# Altium PCB RedesignVaractorTline144Mhz.PcbDoc
Units mil, origin at the board's own origin, x right, y up, seen from the top; angles counter-clockwise.
Board outline 2295 x 1350 mil, 2 copper layers (Top Layer, Bottom Layer); 27 components, 15 nets, 82 pads, 53 vias.
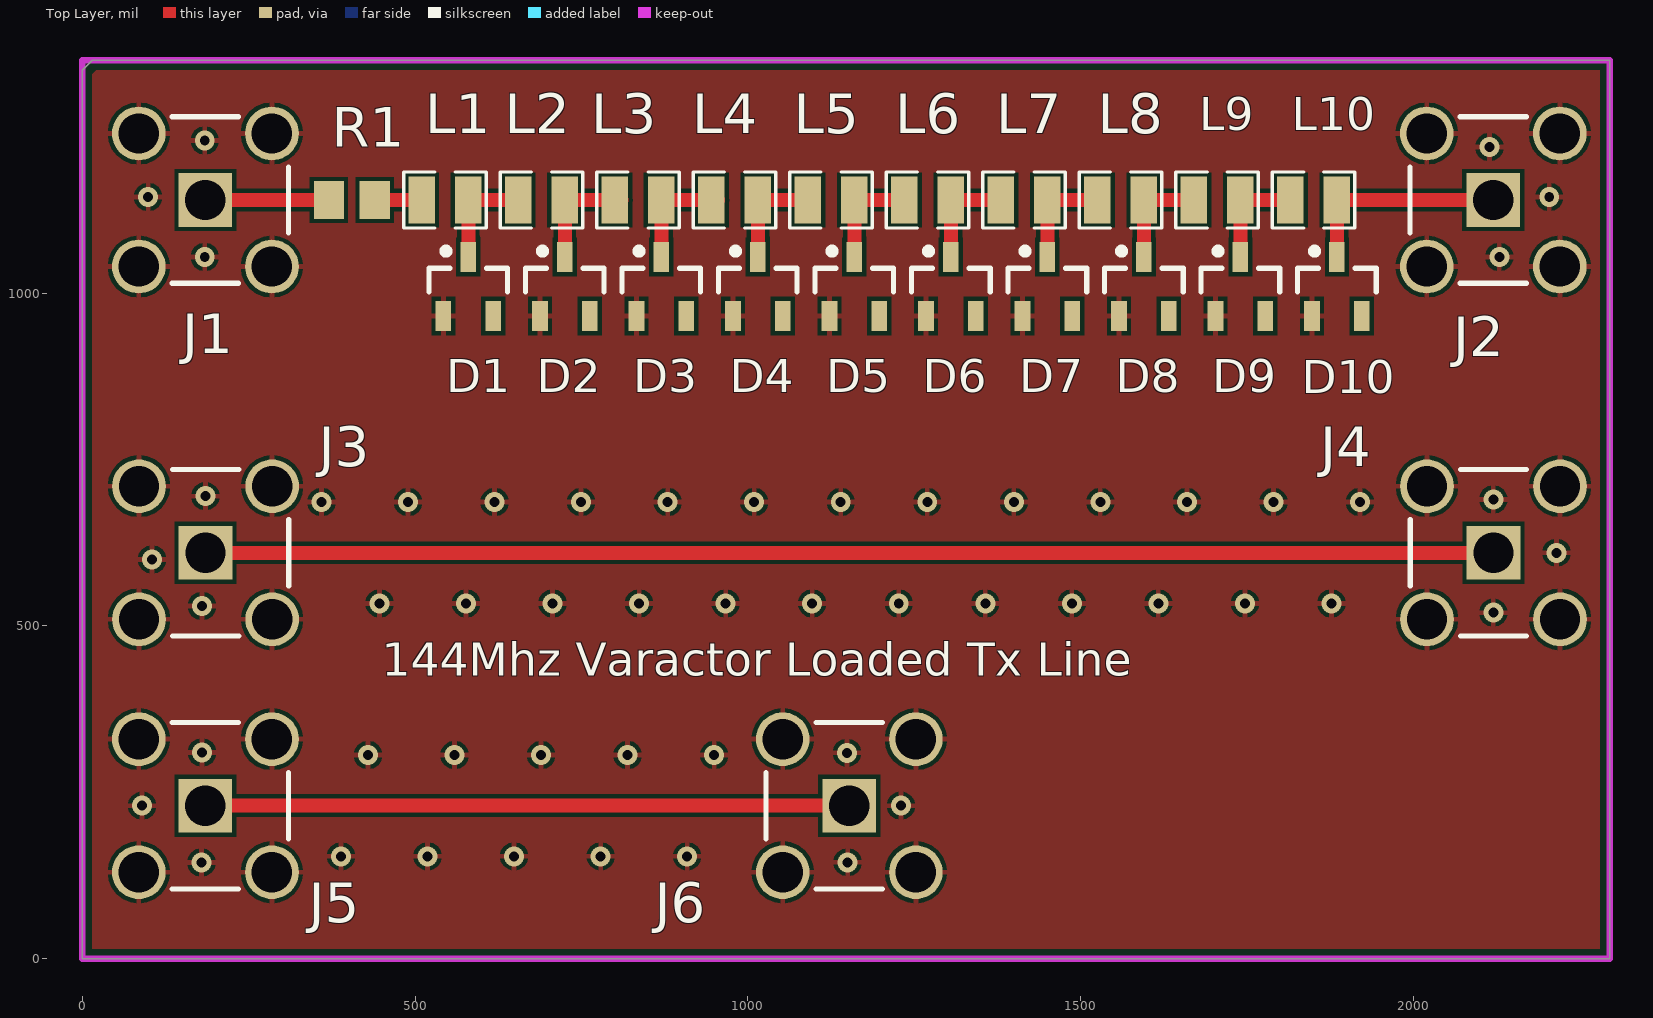
[diagram p0: Top Layer view]
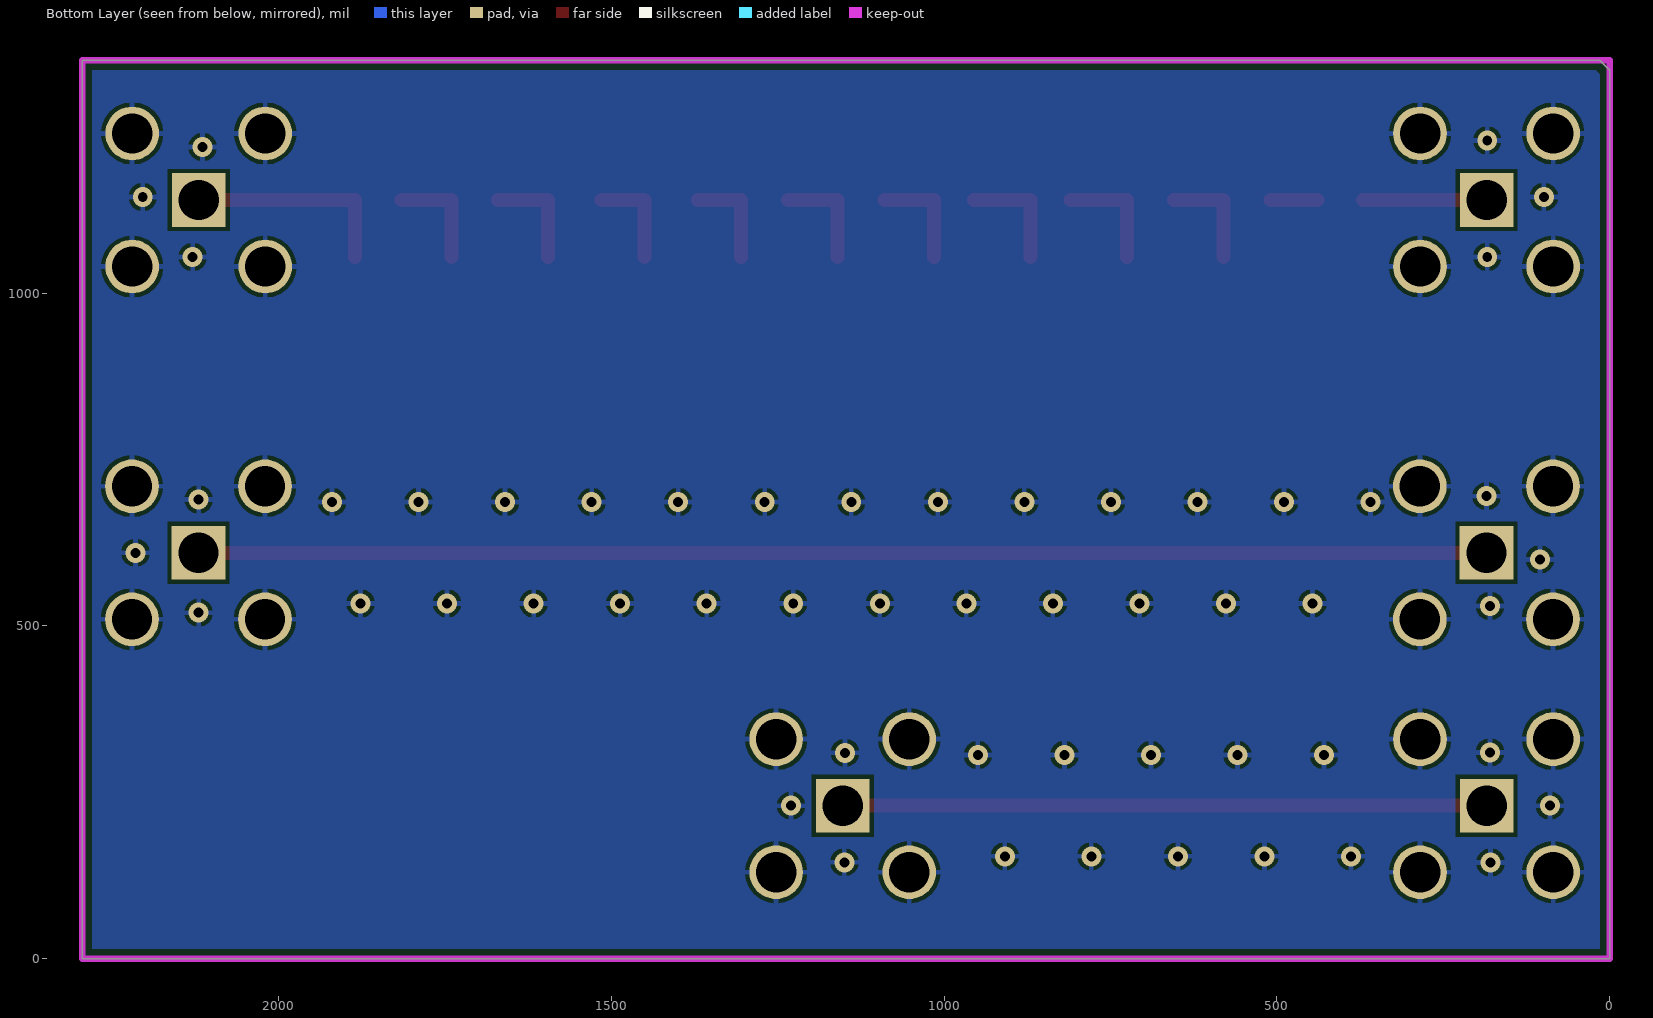
[diagram p1: Bottom Layer view, seen from below]

## Layer stack, top to bottom
Top Solder: solder mask 0.4, Solder Resist, Dk 3.5
Top Layer: signal copper 1.4
Dielectric 1: dielectric 12.598, FR-4, Dk 4.8
Bottom Layer: signal copper 1.4
Bottom Solder: solder mask 0.4, Solder Resist, Dk 3.5

## Board outline
0,1335 0,0 2295,0 2295,1350 15,1350

## Design rules (kind name [scope] priority, off if disabled: settings)
BoardOutlineClearance [All] p1: gap=15 ignorepadtopadclearanceinfootprint=FALSE
Clearance [All] p1: gap=6 ignorepadtopadclearanceinfootprint=FALSE except(0: Arc-Hole Track-Hole SMDPad-Hole THPad-Hole Via-Hole Fill-Hole Poly-Hole Region-Hole Text-Hole)
ComponentClearance [All] p1: gap=1 collisioncheckmode=3 verticalgap=1 showdistances=FALSE
DiffPairsRouting [All] p1: maxlimit=393.7 minlimit=6 mostfreqgap=8 toplayer_minwidth=6 toplayer_maxwidth=15 toplayer_prefwidth=8 bottomlayer_minwidth=6 bottomlayer_maxwidth=15 bottomlayer_prefwidth=8 maxuncoupledlength=500
HoleSize [All] p1: absolutevalues=TRUE maxlimit=265 minlimit=13 maxpercent=80.000 minpercent=20.000
HoleToHoleClearance [All] p1: gap=10 allowstackedmicrovias=FALSE
MinimumAnnularRing [All] p1: minimumring=7
MinimumSolderMaskSliver [All] p1: minsoldermaskwidth=0
PlaneClearance [All] p1: clearance=10
PlaneConnect [All] p1: planeconnectstyle=Direct reliefexpansion=16 reliefentries=4 reliefconductorwidth=6 reliefairgap=6
PolygonConnect [All] p1: connectstyle=Relief reliefconductorwidth=8 reliefentries=4 polygonreliefangle="90 Angle" airgapwidth=6
RoomDefinition RedisignVaractorTline144Mhz [InComponentClass('RedisignVaractorTline144Mhz')] p1: confinementstyle=ConfineOut formatcopy=TRUE lockcomponents=FALSE outline 420,-1900 2420,-1900 2420,-900 420,-900
RoutingCorners [All] p1: cornerstyle=45-Degree minsetback=49.21 maxsetback=49.21
RoutingVias [All] p1: holewidth=15 width=30 viastyle="Through Hole" minholewidth=13 minwidth=27 maxholewidth=100 maxwidth=114
SilkToSilkClearance [All] p1: silktosilkclearance=0
SilkToSolderMaskClearance [IsPad] p1: minsilkscreentomaskgap=4 clearancetoexposedcopper=TRUE
SolderMaskExpansion [All] p1: expansion=2.95 istentingtop=FALSE
Width [All] p1: maxlimit=21.05 minlimit=21.05 preferedwidth=21.05 substack1={EE74C865-3E20-4B42-BFFA-D2353FBDCABD} toplayer_{ee74c865-3e20-4b42-bffa-d2353fbdcabd}_minwidth=10 toplayer_{ee74c865-3e20-4b42-bffa-d2353fbdcabd}_maxwidth=10 toplayer_{ee74c865-3e20-4b42-bffa-d2353fbdcabd}_prefwidth=10 bottomlayer_{ee74c865-3e20-4b42-bffa-d2353fbdcabd}_minwidth=10 bottomlayer_{ee74c865-3e20-4b42-bffa-d2353fbdcabd}_maxwidth=10 bottomlayer_{ee74c865-3e20-4b42-bffa-d2353fbdcabd}_prefwidth=10 impedanceprofiledriven=TRUE minimp=50.000000 maximp=50.000000 favimp=50.000000
20 further rules are at their usual default settings.

## Components (designator, comment, footprint, x,y, rotation, side; value= is the part's Value field where it differs from the comment)
D1 "Diode BBY40" SOT23_N 580,1010 r90 top
D2 "Diode BBY40" SOT23_N 725,1010 r90 top
D3 "Diode BBY40" SOT23_N 870,1010 r90 top
D4 "Diode BBY40" SOT23_N 1015,1010 r90 top
D5 "Diode BBY40" SOT23_N 1160,1010 r90 top
D6 "Diode BBY40" SOT23_N 1305,1010 r90 top
D7 "Diode BBY40" SOT23_N 1450,1010 r90 top
D8 "Diode BBY40" SOT23_N 1595,1010 r90 top
D9 "Diode BBY40" SOT23_N 1740,1010 r90 top
D10 "Diode BBY40" SOT23_N 1885,1010 r90 top
J1 "731000114" MOLX-731000114_V 185,1140 r0 top
J2 "731000114" MOLX-731000114_V 2120,1140 r180 top
J3 "731000114" MOLX-731000114_V 185.32,610 r0 top
J4 "731000114" MOLX-731000114_V 2120.32,610 r180 top
J5 "731000114" MOLX-731000114_V 185,230 r0 top
J6 "731000114" MOLX-731000114_V 1152.5,230 r180 top
L1 "0805HP-56NXJRC" "0805HQ SERIES" 545,1140 r0 top
L2 "0805HP-56NXJRC" "0805HQ SERIES" 690,1140 r0 top
L3 "0805HP-56NXJRC" "0805HQ SERIES" 835,1140 r0 top
L4 "0805HP-56NXJRC" "0805HQ SERIES" 980,1140 r0 top
L5 "0805HP-56NXJRC" "0805HQ SERIES" 1125,1140 r0 top
L6 "0805HP-56NXJRC" "0805HQ SERIES" 1270,1140 r0 top
L7 "0805HP-56NXJRC" "0805HQ SERIES" 1415,1140 r0 top
L8 "0805HP-56NXJRC" "0805HQ SERIES" 1560,1140 r0 top
L9 "0805HP-56NXJRC" "0805HQ SERIES" 1705,1140 r0 top
L10 "0805HP-56NXJRC" "0805HQ SERIES" 1850,1140 r0 top
R1 "Jumper" RESC2013X70X40NL20T20 405,1140 r0 top

## Footprints (in the part's own frame and the unit in brackets; to place one, negate y for a bottom-side part, rotate by r counter-clockwise, add the part's x,y. Pads: shape width x height; smd on the part's side, far side on the other; paste and mask are expansions set on the pad)
"0805HQ SERIES" [mil] "Coilcraft Chip Inductor"
  rect 40x70 smd: 1(-35,0) 2(35,0)
  silkscreen extent -62,-42 62,42, body extent -64,-45 64,45, height 60
MOLX-731000114_V [mm] "Connector, 5-Leads, Body 14.8x6.35mm, Pitch 2.54mm"
  rect 2.05x2.05 hole 1.54: 1(0,0)
  round 2.05 hole 1.54: 2(-2.54,2.54) 3(-2.54,-2.54) 4(2.54,-2.54) 5(2.54,2.54)
  silkscreen extent -1.26,-3.17 3.17,3.17, body extent -11.75,-3.69 3.69,3.69, height 9.57
RESC2013X70X40NL20T20 [mm] "Chip Resistor, 2-Leads, Body 2.00x1.25mm, IPC Medium Density"
  rect 1.15x1.45 smd: 1(-0.875,0) 2(0.875,0)
  body extent -1.1,-0.72 1.1,0.72, height 0.7
SOT23_N [mm] "SOT23, 3-Leads, Body 2.9x1.3mm, Pitch 0.95mm, Lead Span 2.3mm - Reverse Pinning, IPC Medium Density"
  rect 1.15x0.6 smd: 1(1.125,0) 2(-1.125,-0.95) 3(-1.125,0.95)
  silkscreen extent -0.2,-1.5 1.47,1.5, body extent -2,-1.8 2,1.8, height 1.1

## Part data
D1 D2 D3 D4 D5 D6 D7 D8 D9 D10: "SOT23 Silicon Planar Variable Capacitance Diode", ComponentLink1Description="Manufacturer Link", ComponentLink1URL=http://www.zetex.com/, ComponentLink2Description=Datasheet, ComponentLink2URL=www.zetex.com/3.0/pdf/BBY40.pdf, DatasheetVersion=Jan-1998, LatestRevisionDate=29-May-2009, LatestRevisionNote="IPC-7351 Footprint Added.", Note="Pin 2 is not connected and not drawn.", PackageDescription="3-Pin SOT-23 Package 0.95 mm Pitch, 2.3 mm Lead Span - Reverse Pinning", PackageReference=SOT23, PackageVersion=1996, Published=8-Jun-2000, Publisher="Altium Limited"
J1 J2 J3 J4 J5 J6: library part CMP-2000-05487-1, "SMA Right-Angle PCB Jack Receptacle, Brass Body, Gold Plated, 50 Ohm, 5-Pin THD, RoHS, Tray", Manufacturer=Molex, Package Description="5-Pin Through Hole Device, Body 14.8 x 6.35 mm, Pitch 2.54 mm", Datasheet URL=http://www.molex.com/webdocs/datasheets/pdf/en-us/0731000114_RF_COAX_CONNECTORS.pdf, Datasheet Version=09/2016, Manufacturer URL=http://www.molex.com/, Mounting Technology=ThroughHole, Package Reference=731000114, Package URL=http://www.molex.com/pdm_docs/sd/731000114_sd.pdf
L1 L2 L3 L4 L5 L6 L7 L8 L9 L10: "0805HP-56NXJRC Coilcraft Variable Inductor", Manufacturer=Coilcraft, ComponentLink1Description=Datasheet, ComponentLink1URL=https://www.coilcraft.com/0805hp.cfm, Unit Price=$0.82
R1: library part CMP-1665-00002-5, "Chip Resistor, 0 Ohm, +/- 1%, 0.125 W, -55 to 155 degC, 0805 (2012 Metric), RoHS, Tape and Reel", Case Code (Imperial)=0805, Case Code (Metric)=2012, Max Operating Temperature="155 degC", Min Operating Temperature="-55 degC", Package Quantity=5000, PartNumber=ERJ-6GEY0R00V, Resistance="0 Ohm", Tolerance=5%, Case/Package=0805, ComponentLink1Description="Manufacturer URL", ComponentLink1URL=http://www.panasonic.com/, ComponentLink2Description=Datasheet, ComponentLink2URL=http://industrial.panasonic.com/cdbs/www-data/pdf/RDA0000/AOA0000C84.pdf, DatasheetVersion=03/2015, Height="0.6 mm", Length="2 mm", Mounting Technology="Surface Mount", PackageDescription="2-Pin Surface Mount Device, Body 2 x 1.25 mm", Packaging="Tape and Reel", Radiation Hardening=No, REACH SVHC="No SVHC", RoHSCompliant=True, Width="1.25 mm"

## Via types
v1: diameter 30, hole 15, Top Layer to Bottom Layer, 53 vias

## Nets (pads, with @x,y where several pads share a name; then routed paths per layer and width w, separated by ;. In a path a pad name is that pad's centre, name@x,y a point inside that pad or via, vN(x,y) a via of type N, cw(c..) or ccw(c..) an arc to the next point about the centre after c; other vN are vias at no path point)
GND: D1.3 D2.3 D3.3 D4.3 D5.3 D6.3 D7.3 D8.3 D9.3 D10.3 J1.2 J1.3 J1.4 J1.5 J2.2 J2.3 J2.4 J2.5 J3.2 J3.3 J3.4 J3.5 J4.2 J4.3 J4.4 J4.5 J5.2 J5.3 J5.4 J5.5 J6.2 J6.3 J6.4 J6.5
  other v1: 179.07,144.44 1150,145 388.93,153.96 518.93,153.96 648.93,153.96 778.93,153.96 908.93,153.96 90,230 1230,230 429.46,306.04 559.46,306.04 689.46,306.04 819.46,306.04 949.46,306.04 1149.07,309.44 180,310 2120,520 180,530 446.75,533.96 576.75,533.96 706.75,533.96 836.75,533.96 966.75,533.96 1096.75,533.96 1226.75,533.96 1356.75,533.96 1486.75,533.96 1616.75,533.96 1746.75,533.96 1876.75,533.96 105,600 2215,610 359.59,686.04 489.59,686.04 619.59,686.04 749.59,686.04 879.59,686.04 1009.59,686.04 1139.59,686.04 1269.59,686.04 1399.59,686.04 1529.59,686.04 1659.59,686.04 1789.59,686.04 1919.59,686.04 2120,690 185,695 184.07,1054.44 2129.07,1054.44 99.07,1144.44 2204.07,1144.44 2114.07,1219.44 184.07,1229.44
NetD1_1: D1.1 L1.2 L2.1 | length 160.7
  Top Layer w21.05: D1.1 580,1087.45 L1.2 L2.1
NetD2_1: D2.1 L2.2 L3.1 | length 170.7
  Top Layer w21.05: D2.1 L2.2 L3.1 L3.1@810,1140
NetD3_1: D3.1 L3.2 L4.1 | length 170.7
  Top Layer w21.05: D3.1 L3.2 L4.1 L4.1@955,1140
NetD4_1: D4.1 L4.2 L5.1 | length 160.7
  Top Layer w21.05: D4.1 1015,1087.45 L4.2 L5.1
NetD5_1: D5.1 L5.2 L6.1 | length 160.7
  Top Layer w21.05: D5.1 1160,1087.45 L5.2 L6.1
NetD6_1: D6.1 L6.2 L7.1 | length 151
  Top Layer w21.05: D6.1 1305,1094.48 L6.2 1369.29,1140 1369.65,1139.65 L7.1@1370,1140
NetD7_1: D7.1 L7.2 L8.1 | length 151
  Top Layer w21.05: D7.1 1450,1094.48 L7.2 1514.29,1140 1514.65,1139.65 L8.1@1515,1140
NetD8_1: D8.1 L8.2 L9.1 | length 160.7
  Top Layer w21.05: D8.1 1595,1094.48 L8.2 L9.1
NetD9_1: D9.1 L9.2 L10.1 | length 160.7
  Top Layer w21.05: D9.1 1740,1094.48 L9.2 L10.1
NetD10_1: D10.1 J2.1 L10.2 | length 310.7
  Top Layer w21.05: D10.1 1885,1094.48 L10.2 J2.1@2110,1140
NetJ1_1: J1.1 R1.1 | length 185.6
  Top Layer w21.05: J1.1 R1.1
NetJ3_1: J3.1 J4.1 | length 1935
  Top Layer w21.05: J3.1 J4.1
NetJ5_1: J5.1 J6.1 | length 974.6
  Top Layer w21.05: J5.1@190,225 J5.1 J6.1
NetL1_1: L1.1 R1.2 | length 70.6
  Top Layer w21.05: R1.2 L1.1
pads on no net: D1.2 D2.2 D3.2 D4.2 D5.2 D6.2 D7.2 D8.2 D9.2 D10.2

## Polygon pours and split planes (outlines as drawn)
GND on Top Layer "GND" (solid, pour order 5): -95,-745 3170,-745 3170,1415 -95,1415
GND on Bottom Layer "GND" (solid, pour order 6): -95,-745 3170,-745 3170,1415 -95,1415

## Keep-outs
Keep-Out Layer:
  lines w10: 0,0 2295,0 2295,1350 0,1350 0,0

## Silkscreen, mask and mechanical layers (free items; w line width, h text height)
Top Overlay:
  text "144Mhz Varactor Loaded Tx Line" at 450,425 h50
Top Solder:
  text "A" at 1685.19,129.26 h200
  text "3" at 1380,-450 h200